# EAGLE board Adafruit Feather Zero BLE rev B (EAGLE 8.2.2)
REV: A
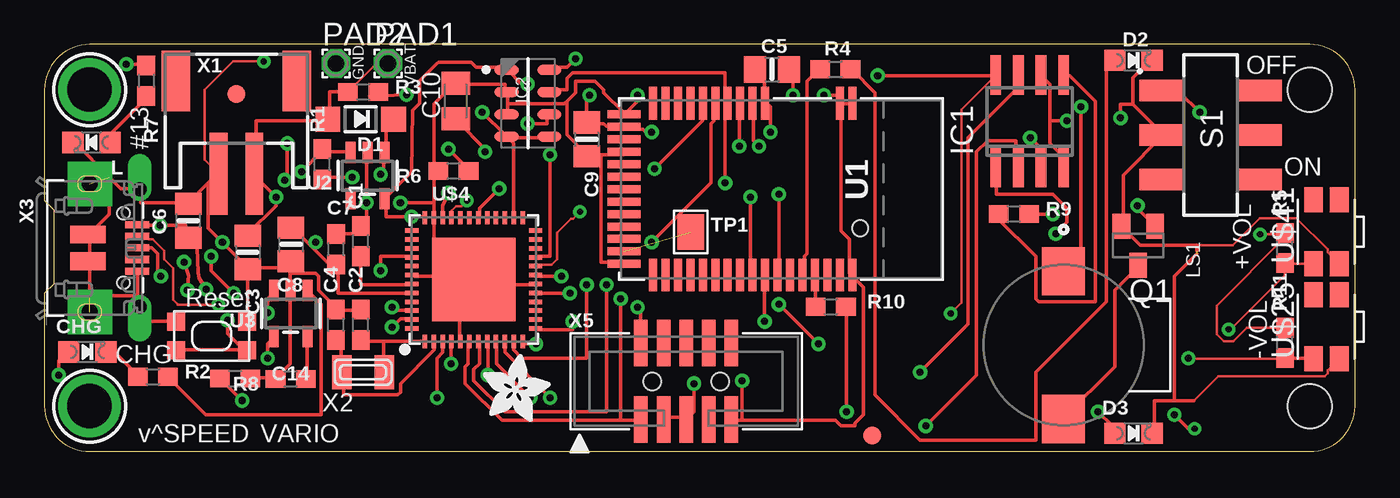
[diagram p0: board, top side]
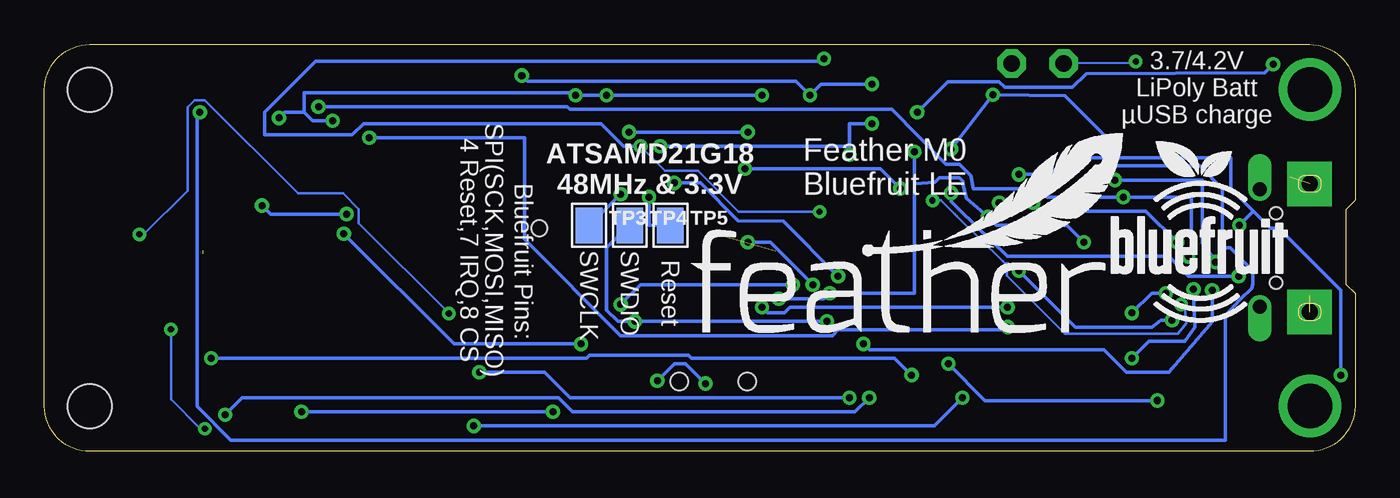
[diagram p1: board, bottom side, seen from below]

Size 73.66 x 22.86 mm. Coordinates in mm from the lower left corner, seen from the top.
Outline: 2.54,0 71.12,0 arc90 73.66,2.54 73.66,20.32 arc90 71.12,22.86 2.54,22.86 arc90 0,20.32 0,14.1 0.51,13.59 0.51,9.4 0,8.89 0,2.54 arc90 2.54,0
Copper layers (1*16): Top 0.035mm / dielectric 1.5mm / Bottom 0.035mm
Design rules "adafruit *": minimum track width 8mil, minimum drill 15.5mil, track to track 8mil, track to pad 8mil, pad to pad 8mil, via to via 8mil, smd to smd 8mil, copper to edge 10mil, drill to drill 8mil, minimum pad ring 10mil, minimum via ring 8mil, stop-mask expansion 2mil, vias tented up to drill 20mil, thermal gap 10mil
Holes 2.5 mm at 71.12,2.54 71.12,20.32
tRestrict: area 21.3,6.9 to 21.7,9.7; area 22.1,12.1 to 27.1,12.4; area 26.5,9.7 to 27.1,12.2; area 46.9,6.1 to 50.7,16.6
bRestrict: area 46.9,6.2 to 50.7,16.8

## Footprints (pad centres in the part's own frame; a part is rotated, then mirrored left to right if it is on the bottom)
0603-NO = smd 1.1 x 1: 1 -0.85,0; 2 0.85,0
0805-NO = smd 1.24 x 1.5: 1 -0.95,0; 2 0.95,0
C0805K = smd 1.3 x 1.6: 1 -1,0; 2 1,0
CHIPLED_0805_NOOUTLINE = smd 1.2 x 1.2: A 0,-1.05; C 0,1.05
SOD-123 = smd 1.4 x 1.4: A 1.85,0; C -1.85,0
SOIC08 = smd 0.6 x 2.2: 1 -1.905,-2.6; 2 -0.635,-2.6; 3 0.635,-2.6; 4 1.905,-2.6; 5 1.905,2.6; 6 0.635,2.6; 7 -0.635,2.6; 8 -1.905,2.6
SON125P300X500X100-8N = smd 1.35 x 0.55: 1 -1.2,1.875; 2 -1.2,0.625; 3 -1.2,-0.625; 4 -1.2,-1.875; 5 1.2,-1.875; 6 1.2,-0.625; 7 1.2,0.625; 8 1.2,1.875
XDCR_SMT-1127-S-R = smd 2.71 x 2.41: 1 -4.15,0; 2 4.15,0
1,6/0,9 = drill 0.914 pad 1.6 octagon: 1 0,0
SOT23 = smd 1 x 1.4: 1 -0.95,-1.1; 2 0.95,-1.1; 3 0,1.1
JS202011SCQN = smd 1.2 x 2.5: 1 -2.5,-2.75; 2 0,-2.75; 3 2.5,-2.75; 4 2.5,2.75; 5 0,2.75; 6 -2.5,2.75
KMR2 = smd 1 x 1: 1 2,0.8; 2 2,-0.8; 3 -2,0.8; 4 -2,-0.8
PAD-1.5X2.0 = smd 1.5 x 2: P$1 0,0
BLE_MODULE_RAYTAC_MDBT40 = smd 1.85 x 0.45: 1 -4.825,4; 2 -4.825,3.3; 3 -4.825,-0.9; 4 -4.825,-1.6; 5 -4.825,-2.3; 6 -4.825,-3; 7 -4.825,-3.7; 8 -4.825,-4.4; 9 -4.825,-5.1; 10 -4.825,-5.8; 11 -4.825,-6.5; 12 -4.825,-7.2; 26 4.825,-7.2; 27 4.825,-6.5; 28 4.825,-5.8; 29 4.825,-5.1; 30 4.825,-4.4; 31 4.825,-3.7; 32 4.825,-3; 33 4.825,-2.3; 34 4.825,-1.6; 35 4.825,-0.9; 36 4.825,-0.2; 37 4.825,0.5; 38 4.825,1.2; 39 4.825,1.9; 40 4.825,2.6; 41 4.825,3.3; 42 4.825,4 | smd 0.45 x 1.85: 13 -4.2,-8.825; 14 -3.5,-8.825; 15 -2.8,-8.825; 16 -2.1,-8.825; 17 -1.4,-8.825; 18 -0.7,-8.825; 19 0,-8.825; 20 0.7,-8.825; 21 1.4,-8.825; 22 2.1,-8.825; 23 2.8,-8.825; 24 3.5,-8.825; 25 4.2,-8.825 | hole 0.9: 2.2,4.45
SOT23-5 = smd 0.55 x 1.2: 1 -0.95,-1.3; 2 0,-1.3; 3 0.95,-1.3; 4 0.95,1.3; 5 -0.95,1.3
TQFN48_7MM = smd 0.25 x 0.75: 1 -2.75,-3.475; 2 -2.25,-3.475; 3 -1.75,-3.475; 4 -1.25,-3.475; 5 -0.75,-3.475; 6 -0.25,-3.475; 7 0.25,-3.475; 8 0.75,-3.475; 9 1.25,-3.475; 10 1.75,-3.475; 11 2.25,-3.475; 12 2.75,-3.475; 25 2.75,3.475; 26 2.25,3.475; 27 1.75,3.475; 28 1.25,3.475; 29 0.75,3.475; 30 0.25,3.475; 31 -0.25,3.475; 32 -0.75,3.475; 33 -1.25,3.475; 34 -1.75,3.475; 35 -2.25,3.475; 36 -2.75,3.475 | smd 0.75 x 0.25: 13 3.475,-2.75; 14 3.475,-2.25; 15 3.475,-1.75; 16 3.475,-1.25; 17 3.475,-0.75; 18 3.475,-0.25; 19 3.475,0.25; 20 3.475,0.75; 21 3.475,1.25; 22 3.475,1.75; 23 3.475,2.25; 24 3.475,2.75; 37 -3.475,2.75; 38 -3.475,2.25; 39 -3.475,1.75; 40 -3.475,1.25; 41 -3.475,0.75; 42 -3.475,0.25; 43 -3.475,-0.25; 44 -3.475,-0.75; 45 -3.475,-1.25; 46 -3.475,-1.75; 47 -3.475,-2.25; 48 -3.475,-2.75 | smd 4.7 x 4.7: THERMAL 0,0
EVQP7A01P = smd 1.4 x 1.05: 1 0,1.45; 1' 3.6,1.45; 2 0,0; 2' 3.6,0
MOUNTINGHOLE_2.5_PLATED = drill 2.5 pad 3.2: P$1 0,0
FIDUCIAL_1MM = smd 1 x 1: 1 0,0
JSTPH2 = smd 1 x 4.6: 1 -1,-3.7; 2 1,-3.7 | smd 1.6 x 3.4: NC1 -3.4,1.5; NC2 3.4,1.5
XTAL3215 = smd 1.1 x 1.9: P$1 1.2,0; P$2 -1.2,0
4UCONN_20329_V2 = smd 1 x 2: BASE@1 -0.75,-2; BASE@2 0.75,-2 | smd 0.4 x 1.35: D+ 0,0.775; D- -0.65,0.775; GND 1.3,0.775; ID 0.65,0.775; VBUS -1.3,0.775 | drill 0.8 pad 1.2 offset: SPRT@1 -3.3,0.9; SPRT@2 3.3,0.9 | drill 0.9 pad 2.5 square: SPRT@3 -3.6,-1.9; SPRT@4 3.6,-1.9 | hole 0.7: -1.95,0; 1.95,0
2X05_1.27MM_BOX_POSTS = smd 0.76 x 2.6: 1 -2.54,-2.15; 2 -2.54,2.15; 3 -1.27,-2.15; 4 -1.27,2.15; 5 0,-2.15; 6 0,2.15; 7 1.27,-2.15; 8 1.27,2.15; 9 2.54,-2.15; 10 2.54,2.15 | hole 1: -1.905,0; 1.905,0

## Placement (x,y rotation side)
C1  1uF  [0603-NO]  17.78,11.81 90 top
C2  22pF  [0603-NO]  17.78,7.11 90 top
C3  10µF  [0805-NO]  11.43,11.18 270 top
C4  22pF  [0603-NO]  16.38,7.11 90 top
C5  10uF  [0805-NO]  40.89,21.46 0 top
C6  10µF  [0805-NO]  8.09,12.96 90 top
C7  1uF  [0603-NO]  16.4,11.35 90 top
C8  10µF  [0805-NO]  13.86,11.62 270 top
C9  10uF  [0805-NO]  30.48,17.53 270 top
C10  0.1uF  [C0805K]  23.11,19.68 90 top
C14  1uF  [0603-NO]  10.72,4.09 0 top
CHG  ORANGE  [CHIPLED_0805_NOOUTLINE]  2.41,5.59 270 top
D1  MBR120  [SOD-123]  17.78,18.67 180 top
D2  RED  [CHIPLED_0805_NOOUTLINE]  61.21,21.97 270 top
D3  BLUE  [CHIPLED_0805_NOOUTLINE]  61.21,1.02 270 top
IC1  X9C102S  [SOIC08]  55.37,18.54 0 top
IC2  MS5611-01BA03  [SON125P300X500X100-8N]  27.18,19.56 0 top
L  RED  [CHIPLED_0805_NOOUTLINE]  2.65,17.36 90 top
LS1  SMT-1127-S-R  [XDCR_SMT-1127-S-R]  57.28,5.97 270 top
PAD1  WIREPAD1,6/0,9  [1,6/0,9]  19.3,21.79 0 top
PAD2  WIREPAD1,6/0,9  [1,6/0,9]  16.38,21.79 0 top
Q1  MMBT2222ALT3G  [SOT23]  61.47,11.56 180 top
R1  100k  [0603-NO]  15.62,16.13 90 top
R2  1K  [0603-NO]  6.1,4.19 0 top
R3  100k  [0603-NO]  17.91,20.19 0 top
R4  2.2K  [0603-NO]  44.45,21.46 0 top
R5  1K  [0603-NO]  69.72,11.43 90 top
R6  100K  [0603-NO]  22.99,15.75 180 top
R7  2.2K  [0603-NO]  5.71,20.83 270 top
R8  10K\  [0603-NO]  13.84,4.06 180 top
R9  1K  [0603-NO]  54.48,13.34 0 top
R10  2.2K  [0603-NO]  44.2,8.13 0 top
R11  1K  [0603-NO]  69.72,6.1 90 top
S1  JS202011SCQN  [JS202011SCQN]  65.53,17.78 270 top
SW1  SPST_TACT-KMR2  [KMR2]  9.4,6.48 180 top
TP1  SWCLK  [PAD-1.5X2.0]  36.32,12.32 0 top
TP3  SWCLK  [PAD-1.5X2.0]  43.05,12.7 0 bottom
TP4  SWDIO  [PAD-1.5X2.0]  40.77,12.7 0 bottom
TP5  SWDIO  [PAD-1.5X2.0]  38.48,12.7 0 bottom
U1  MBT40  [BLE_MODULE_RAYTAC_MDBT40]  41.4,14.73 270 top
U2  AP2112-3.3  [SOT23-5]  18.16,15.49 180 top
U3  MCP73831T-2ACI/OT  [SOT23-5]  13.84,7.75 180 top
U$4  ATSAMD21G18_QFN  [TQFN48_7MM]  24.13,9.65 0 top
U$7  [ADAFRUIT_3.5MM]  24.64,1.65 0 top
U$9  [FEATHERLOGO]  37.34,6.6 0 bottom
U$25  EVQP7A01P  [EVQP7A01P]  72.77,5.21 90 top
U$26  [BLUEFRUITLOGO_100MM]  13.72,7.24 0 bottom
U$31  MOUNTINGHOLE2.5  [MOUNTINGHOLE_2.5_PLATED]  2.54,20.32 270 top
U$32  MOUNTINGHOLE2.5  [MOUNTINGHOLE_2.5_PLATED]  2.54,2.54 270 top
U$34  FIDUCIAL""  [FIDUCIAL_1MM]  10.79,20.07 270 top
U$35  FIDUCIAL""  [FIDUCIAL_1MM]  46.53,0.9 270 top
U$41  EVQP7A01P  [EVQP7A01P]  72.77,10.54 90 top
X1  JSTPH  [JSTPH2]  10.79,19.3 0 top
X2  32.768  [XTAL3215]  17.91,4.45 0 top
X3  microUSB  [4UCONN_20329_V2]  4.45,11.43 270 top
X5  4u20317  [2X05_1.27MM_BOX_POSTS]  36.07,3.94 0 top

## Library data of the parts
C1-C7 C9 C14 CHG D1-D3 L R1-R11 TP1 TP3-TP5 U1-U3 U$4 U$7 U$9 X1 X3 X5 = microbuilder
C8 = microbuilder; COMPANY: ADAFRUIT INDUSTRIES; DRAWN: KTOWN; REV: A
C10 = rcl
IC1 = pot-xicor; MF: INTERSIL; MPN: X9C102SIZ; OC_FARNELL: 1562072; OC_NEWARK: 79K8947
IC2 = Measurement-Specialties
LS1 = SMT-1127-S-R; AVAILABILITY: Good; DESCRIPTION: Black Passive Electromagnetic SMD Buzzer 3V 80mA 2700Hz 92dB 9x3.2mm; MF: PUI Audio; MP: BOT-03D-BUJEON, SMT-1127-S-R; PACKAGE: None; PRICE: 1.43 USD
PAD1 PAD2 = wirepad
Q1 = semicon-smd-ipc
S1 = JS202011SCQN; DESCRIPTION: Sub miniature slide switches; HEIGHT: mm; MANUFACTURER_NAME: C & K COMPONENTS; MANUFACTURER_PART_NUMBER: JS202011SCQN; RS_PART_NUMBER: 1534125; RS_PRICE/STOCK: http://uk.rs-online.com/web/p/products/1534125
SW1 U$26 = adafruit
U$25 U$41 = EVQP7A01P
U$31 U$32 U$34 U$35 = microbuilder; BOM: EXCLUDE
X2 = adafruit2

## Nets
!RESET: SW1.1 SW1.3 U$4.40
+3V3: C5.1 C7.1 C8.1 C9.1 C10.1 IC1.8 IC2.1 R5.2 R11.2 U1.3 U1.14 U2.5 U$4.6 U$4.17 U$4.36 U$4.44 X5.1
A0_POT_UD: IC1.2 U$4.3
A1_POT_INC: IC1.1 U$4.7
A2_VOL_DOWN: R11.1 U$4.8 U$25.1
A3_VOL_UP: R5.1 U$4.9 U$41.1
A4_POT_CS: IC1.7 U$4.10
A5_BEEP_CTRL: IC1.3 U$4.47
AREF: C14.1 U$4.4
BLE_SWCLK: TP3.P$1 U1.36
CONNECTED: R10.1 U1.39
D0: U$4.16
D1: U$4.15
D2: U$4.23
D3: U$4.14
D4_SWDIO/RST: TP4.P$1 U1.35 U$4.13
D5: U$4.24
D6: U$4.29
D7_BLE_IRQ: U1.8 U$4.30
D8_BLE_CS: U1.7 U$4.11
D9: R3.2 R6.1 U$4.12
D10: U$4.27
D11: U$4.25
D12: U$4.28
D13_MS5611_CSB: IC2.4 IC2.5 R7.1 U$4.26
D+: U$4.34 X3.D+
D-: U$4.33 X3.D-
DCC: U1.15
DEC2: U1.41
DFU: TP1.P$1 U1.24
EN: R1.2 S1.1 U2.3
FCTRYRST: TP5.P$1 U1.34
GND: C1.2 C2.2 C3.2 C4.2 C5.2 C6.2 C7.2 C8.2 C9.2 C10.2 C14.2 D2.C D3.C IC1.4 IC1.6 IC2.2 IC2.3 L.C PAD2.1 Q1.2 R6.2 R8.2 S1.2 SW1.2 SW1.4 U1.1 U1.2 U1.13 U1.16 U1.25 U1.42 U2.2 U3.2 U$4.5 U$4.18 U$4.35 U$4.42 U$4.THERMAL U$25.2 U$41.2 X1.1 X3.BASE@1 X3.BASE@2 X3.GND X3.SPRT@1 X3.SPRT@2 X3.SPRT@3 X3.SPRT@4 X5.3 X5.5 X5.9
MISO: IC2.6 U1.5 U$4.21
MODE: R4.1 U1.38
MOSI: IC2.7 U1.6 U$4.19
N$1: CHG.C R2.1
N$2: L.A R7.2
N$3: R2.2 U3.1
N$4: R8.1 U3.5
N$5: C2.1 U$4.1 X2.P$1
N$6: D2.A R4.2
N$7: C4.1 U$4.2 X2.P$2
N$8: D3.A R10.2
N$9: Q1.1 R9.2
N$10: LS1.2 Q1.3
SCK: IC2.8 U1.4 U$4.20
SCL: U$4.32
SDA: U$4.31
SWCLK: U$4.45
SWDCLK: X5.4
SWDIO: U$4.46 X5.2
VBAT: C3.1 D1.A LS1.1 PAD1.1 R3.1 U3.3 X1.2
VBUS: C6.1 CHG.A D1.C R1.1 U2.1 U3.4 X3.VBUS
VDDCORE: C1.1 U$4.43
WIPER: IC1.5 R9.1

## Tracks (layer width: path | path; a pad name or v marks a point on that pad's centre or on a via)
!RESET  (via drill 0.39)
  Top 0.203: v18.89,10.16 18.89,10.95 20.64,10.95 U$4.40 | v10.29,7.37 10.29,6.6 11.02,5.87 11.27,5.87 11.27,5.71 | 11.27,5.71 7.46,5.71 SW1.1 | 11.27,5.71 SW1.3
  Bottom 0.203: v18.89,10.16 15.72,6.99 11.43,6.99 10.92,7.37 v10.29,7.37
+3V3  (via drill 0.35, 0.39)
  Top 0.152: R11.2 67.57,6.95 66.82,6.2 66.28,6.2 65.89,6.59 65.89,8.19 69.72,12.03 R5.2 69.64,12.19 v68.33,12.19 | IC1.8 51.53,19.2 51.53,8.35 v50.93,7.75
  Top 0.203: C5.1 40.01,21.43 40.48,20.95 40.48,19.68 U1.3 40.64,19.53 40.8,19.37 v40.8,17.94 | v46.83,21.11 53.34,21.11 IC1.8 | v30.64,20 30.48,19.84 C9.1 30.48,18.41 31.43,18.41 31.59,18.26 32.54,18.26 U1.14 32.7,18.1 33.66,18.1 33.81,17.94 v34.13,17.94 | U$4.36 21.27,13.18 v20.64,13.18 19.21,13.18 19.21,14.13 U2.5 19.21,14.29 20.64,15.72 20.7,19.18 21.08,19.56 21.08,20.83 22.04,21.78 22.16,21.88 23.97,21.88 24.26,21.59 25.88,21.59 IC2.1 26.04,21.43 26.83,20.64 v27.15,20.64 | 16.51,10 16.51,10.48 C7.1 16.51,10 | 16.51,10 16.51,8.89 20.64,8.89 U$4.44 | 16.51,10 15.08,11.43 | 15.08,11.43 13.97,12.54 C8.1 | 32.38,1.75 33.5,1.75 X5.1 | 32.38,1.75 25.72,1.75 23.65,3.81 23.65,4.76 23.81,4.92 23.81,6.03 U$4.6 | v29.53,8.89 27.62,8.89 U$4.17 | 32.38,1.75 v32.38,8.57 | v24.77,16.83 24.77,16.99 23.18,18.57 C10.1 | 15.08,11.43 15.24,11.59 v15.24,11.75
  Bottom 0.152: v50.93,7.75 55.99,12.81 55.99,13.62 56.87,14.49 59.41,14.49 64.65,19.73 65.21,19.73 65.61,19.33 65.61,14.66 68.07,12.19 v68.33,12.19
  Bottom 0.203: v46.83,21.11 46.51,20.8 31.43,20.8 v30.64,20 30,20.64 v27.15,20.64 | v34.13,17.94 v40.8,17.94 | v32.38,8.57 29.84,8.57 v29.53,8.89 24.77,8.89 24.77,15.05 | 24.77,15.05 v24.77,16.83 | v15.24,11.75 16.19,12.7 20.16,12.7 v20.64,13.18 21.84,14.22 22.04,15.05 22.04,15.18 22.23,15.37 23.37,15.37 23.62,15.11 24.77,15.05
A0_POT_UD  (via drill 0.39)
  Top 0.203: v22.07,3.02 22.07,5.24 22.38,5.56 22.38,6.03 U$4.3 | v49.53,1.43 52.39,4.29 52.39,16.83 53.02,17.46 54.61,17.46 54.61,16.03 IC1.2
  Bottom 0.203: v22.07,3.02 23.65,1.43 v49.53,1.43
A1_POT_INC  (via drill 0.39)
  Top 0.203: v31.59,9.37 31.59,2.22 25.88,2.22 24.13,3.97 24.13,4.6 24.45,4.92 24.45,6.03 U$4.7 | v43.5,6.03 v41.27,8.26 | v56.83,12.22 57.47,12.86 57.47,13.65 56.67,14.45 53.5,14.45 53.5,15.88 IC1.1
  Bottom 0.203: v31.59,9.37 40.16,9.37 v41.27,8.26 | v43.5,6.03 50.64,6.03 v56.83,12.22
A2_VOL_DOWN  (via drill 0.39)
  Top 0.152: v64.29,5.24 64.33,5.21 U$25.1 71.28,5.25 R11.1
  Top 0.203: v24.92,4.29 24.92,6.03 U$4.8
  Bottom 0.203: v24.92,4.29 25.88,5.24 37.31,5.24 37.47,5.4 43.02,5.4 43.18,5.24 v64.29,5.24
A3_VOL_UP  (via drill 0.35, 0.39)
  Top 0.152: U$41.1 69.76,10.54 R5.1 69.72,9.91 66.67,6.86 v66.55,6.86 | v64.64,1.27 64.29,1.27
  Top 0.203: v27.3,3.02 25.4,4.92 25.4,6.03 U$4.9 | 64.29,1.27 v63.5,2.06
  Bottom 0.152: v66.55,6.86 66.55,2.92 64.9,1.27 v64.64,1.27
  Bottom 0.203: v27.3,3.02 28.1,2.22 43.97,2.22 44.77,3.02 62.55,3.02 v63.5,2.06
A4_POT_CS  (via drill 0.39)
  Top 0.203: v28.42,3.02 25.88,5.56 25.88,6.03 U$4.10 | v49.21,4.45 51.91,7.14 51.91,17.62 54.61,20.32 54.61,21.11 IC1.7
  Bottom 0.203: v28.42,3.02 44.13,3.02 45.56,4.45 v49.21,4.45
A5_BEEP_CTRL  (via drill 0.39)
  Top 0.203: v19.53,6.99 20,7.46 20.64,7.46 U$4.47 | v55.4,17.62 55.88,17.14 55.88,16.03 IC1.3
  Bottom 0.203: v19.53,6.99 19.68,6.83 29.05,6.83 29.37,6.51 41.27,6.51 46.67,11.91 46.67,17.62 v55.4,17.62
AREF  (via drill 0.39)
  Top 0.203: v22.86,4.92 22.86,6.03 U$4.4 | v11.11,2.86 10,3.97 C14.1
  Bottom 0.203: v22.86,4.92 20.8,2.86 v11.11,2.86
BLE_SWCLK  (via drill 0.39)
  Top 0.203: v41.27,14.45 41.27,10 U1.36
  Bottom 0.203: v41.27,14.45 43.02,12.7 TP3.P$1
CONNECTED
  Top 0.203: R10.1 43.34,8.26 43.34,9.84 U1.39
D4_SWDIO/RST  (via drill 0.39)
  Top 0.203: v29.69,7.3 29.69,6.83 27.62,6.83 U$4.13 | v40.48,7.3 40.48,9.84 U1.35
  Bottom 0.203: v29.69,7.3 v40.48,7.3 41.43,7.3 42.07,7.94 42.07,11.43 40.8,12.7 TP4.P$1
D7_BLE_IRQ  (via drill 0.39)
  Top 0.203: v25.56,14.76 24.45,13.65 24.45,13.18 U$4.30 | v34.29,15.88 36.99,18.57 36.99,19.53 U1.8
  Bottom 0.203: v25.56,14.76 26.67,15.88 v34.29,15.88
D8_BLE_CS  (via drill 0.39)
  Top 0.203: v30.48,9.37 30.48,5.24 26.83,5.24 26.35,5.71 26.35,6.03 U$4.11 | v34.13,11.75 37.47,15.08 37.47,18.41 37.62,18.57 37.62,19.53 U1.7
  Bottom 0.203: v30.48,9.37 32.86,11.75 v34.13,11.75
D9  (via drill 0.39)
  Top 0.203: v27.62,6.03 26.99,6.03 U$4.12 | v8.03,9.05 8.1,9.87 v7.84,10.64 | v13.49,15.24 13.65,15.4 v13.65,17.3 | v20.35,20.04 18.29,19.94 R3.2 | v22.7,16.99 23.81,15.88 R6.1
  Bottom 0.203: v27.62,6.03 27.3,5.71 14.13,5.71 12.86,4.45 10.48,4.45 8.03,7.27 v8.03,9.05 | v7.84,10.64 8.57,11.75 8.57,15.24 v13.49,15.24 | v13.65,17.3 16.32,19.97 v20.35,20.04 v22.7,16.99
D13_MS5611_CSB  (via drill 0.39)
  Top 0.203: 26.04,17.62 26.35,17.3 26.35,13.18 U$4.26 | v4.6,21.75 5.71,21.75 R7.1 | v24.61,19.05 25.88,17.78 IC2.4 26.04,17.62 | 26.04,17.62 28.26,17.62 IC2.5
  Bottom 0.203: v4.6,21.75 5.08,21.27 15.11,21.21 15.88,20.45 19.68,20.45 20,20.77 22.89,20.77 v24.61,19.05
D+  (via drill 0.39)
  Top 0.203: v22.7,14.51 22.38,13.81 22.38,13.18 U$4.34 | v6.54,9.84 6.35,10.16 6.35,11.11 6.03,11.43 X3.D+
  Bottom 0.203: v22.7,14.51 22.7,14.06 22.23,13.59 19.53,10.95 10.48,10.95 9.37,9.84 v6.54,9.84
D-  (via drill 0.35)
  Top 0.152: v23.75,14.1 23.43,13.78 23.14,13.78 22.88,13.52 U$4.33 | v9.78,8.26 9.82,8.26 9.04,8.24 7.5,8.24 7.49,8.26 7.24,8.51 7.24,10.28 6.73,10.79 6.73,11.27 6.09,11.91 5.87,11.91 5.7,12.08 X3.D-
  Bottom 0.152: v23.75,14.1 23.27,14.1 22.49,13.32 22.38,13.21 19.79,10.68 19.68,10.57 19.52,10.57 19.48,10.53 19.57,10.44 19.57,9.88 16.3,6.6 9.96,6.6 9.48,7.21 9.61,8.34 v9.78,8.26
DFU  (1 unrouted)
EN  (via drill 0.39)
  Top 0.203: U2.3 17.14,16.83 15.72,16.83 R1.2 15.56,16.83 v14.45,15.72 | v64.93,19.05 63.82,20.16 S1.1
  Bottom 0.203: v14.45,15.72 14.13,16.03 8.73,16.03 7.46,14.76 7.46,11.43 7.02,11.43 5.75,10.16 5.75,9.43 5.81,9.18 6.48,8.51 7.3,7.62 7.3,0.64 63.18,0.64 65.09,2.54 65.09,19.05 v64.93,19.05
FCTRYRST  (via drill 0.39)
  Top 0.203: v39.69,14.29 39.69,10 U1.34
  Bottom 0.203: v39.69,14.29 39.69,12.7 TP5.P$1
GND  (via drill 0.35, 0.39)  (3 unrouted)
  Top 0.152: v12.32,21.91 10.61,21.91 9.02,20.32 9.02,16.38 X1.1 | U$25.2 72.12,4.56 72.12,4.39 71.96,4.23 65.98,4.23 64.61,2.86 | U$41.2 72.12,11.19 72.12,11.36 70.37,13.11 68.31,13.11 66.79,11.59 64.77,11.59
  Top 0.203: SW1.4 11.43,7.3 C3.2 11.43,10.32 | C14.2 11.59,4.13 12.86,4.13 R8.2 13.02,4.13 13.81,4.92 13.81,8.89 U3.2 13.81,9.05 13.81,10 | C2.2 17.78,7.94 16.51,7.94 C4.2 16.35,8.1 15.4,9.05 15.4,9.84 15.24,10 13.81,10 | 13.81,10.32 13.81,10.64 C8.2 13.81,10.32 | 13.81,10.32 13.81,10 | 13.81,10.32 11.43,10.32 | 9.21,15.08 9.68,15.56 X1.1 | 9.21,15.08 8.1,13.97 C6.2 7.94,13.97 5.4,13.97 5.4,14.61 X3.SPRT@1 5.24,14.76 4.29,14.76 3.65,15.4 | SW1.2 7.3,7.3 5.4,7.3 5.4,8.1 X3.SPRT@2 | 5.24,8.73 5.24,8.26 X3.SPRT@2 | 5.24,8.73 5.24,10 X3.GND | 3.65,15.4 1.75,17.3 L.C | 3.65,15.4 3.65,13.34 2.54,12.22 X3.BASE@1 2.54,12.06 2.54,10.79 X3.BASE@2 2.54,10.64 2.54,8.73 5.24,8.73 | 5.24,8.73 X3.SPRT@2 | 11.43,10.32 v10,11.75 9.21,12.54 9.21,15.08 | C7.2 16.51,12.22 17.78,12.22 C1.2 17.78,12.7 18.1,13.02 v18.1,13.97 18.1,16.67 U2.2 | 23.97,9.37 24.13,9.53 U$4.THERMAL | 23.97,9.37 23.34,8.73 23.34,6.19 U$4.5 | 21.91,9.84 24.13,9.84 U$4.THERMAL | 21.91,9.84 20.8,9.84 U$4.42 | 23.97,9.37 27.46,9.37 U$4.18 | 23.97,9.37 U$4.THERMAL | 21.91,9.84 21.91,13.02 U$4.35 21.91,13.18 21.91,13.97 | 21.91,9.84 U$4.THERMAL | 21.91,13.97 21.91,15.56 22.07,15.72 R6.2 22.07,15.88 21.91,16.03 21.91,19.53 23.02,20.64 C10.2 23.18,20.64 25.88,20.64 25.88,20.32 IC2.2 26.04,20.16 26.04,19.53 | 21.91,13.97 v20,13.97 | 31.27,16.67 32.54,16.67 32.54,16.83 U1.16 | 31.27,16.67 30.48,16.67 | 31.27,16.67 31.27,10.64 32.54,10.64 U1.25 | 26.04,19.53 26.04,19.05 IC2.3 | 29.37,19.68 29.21,19.53 26.04,19.53 | 29.37,19.68 29.84,20.16 29.84,20.8 30.96,20.8 31.43,20.32 31.43,20.16 32.54,19.05 U1.13 32.7,19.05 33.34,19.68 v33.34,20 | 30.48,16.67 29.37,17.78 29.37,19.68
  Top 0.203: 30.48,16.67 C9.2 | 61.18,19.49 61.18,20.99 62.1,21.91 D2.C | 62.9,17.78 61.18,19.49 | 63.5,2.86 62.39,2.86 62.39,1.11 D3.C | 64.61,2.86 63.5,2.86 | 64.77,11.11 63.5,9.84 63.5,2.86 | 64.77,11.27 64.77,11.59 61.59,11.59 60.64,12.54 Q1.2 60.64,12.7 60.64,15.53 62.9,17.78 | 62.9,17.78 S1.2 | 56.52,18.57 56.52,17.3 57.15,16.67 57.15,16.03 IC1.4 | 56.52,18.57 56.52,20.64 56.04,21.11 IC1.6 | X5.3 34.92,1.91 36.04,1.91 X5.5 36.2,1.91 36.51,2.22 v36.51,3.81 | v42.07,20 42.07,21.27 41.91,21.43 C5.2 | v43.81,20 44.61,20 44.61,19.68 U1.2 44.77,19.53 | 44.77,19.53 44.77,12.38 45.24,11.91 45.24,10 U1.42 45.4,9.84 46.04,9.21 46.04,2.06 45.56,1.59 45.56,1.43 44.77,1.43 44.45,1.75 39.21,1.75 | 44.77,19.53 45.24,19.53 U1.1 | 39.21,1.75 38.73,1.75 X5.9 | 39.21,1.75 v39.21,3.97 | v57.47,18.57 56.52,18.57 | 61.18,19.49 60.48,19.49 v60.48,18.73
  Bottom 0.152: PAD2.1 12.38,21.84 v12.32,21.91
  Bottom 0.203: v20,13.97 v18.1,13.97 17.62,13.49 11.75,13.49 v10,11.75 | v36.51,3.81 37.62,4.92 38.26,4.92 v39.21,3.97 | v57.47,18.57 58.58,18.57 59.05,19.05 | 59.05,19.05 59.05,20.16 43.97,20.16 v43.81,20 v42.07,20 v33.34,20 | v60.48,18.73 60.17,19.05 59.05,19.05
MISO  (via drill 0.39)
  Top 0.203: v28.42,16.67 28.42,10.95 27.62,10.95 U$4.21 | v27.15,18.41 28.26,18.41 28.26,18.89 IC2.6 | v39.05,17.14 39.05,19.53 U1.5
  Bottom 0.203: 28.42,17.14 28.42,18.41 v27.15,18.41 | 28.42,17.14 v28.42,16.67 | 28.42,17.14 v39.05,17.14
MODE
  Top 0.203: R4.1 43.5,21.43 42.86,20.8 42.86,11.11 42.7,10.95 42.7,10 U1.38
MOSI  (via drill 0.39)
  Top 0.203: v29.05,9.84 27.62,9.84 U$4.19 | v38.26,15.08 38.26,19.53 U1.6 38.26,19.68 38.26,21.27 29.69,21.27 29.37,20.95 29.37,20.32 28.42,20.32 IC2.7
  Bottom 0.203: v29.05,9.84 32.13,12.92 34.67,12.95 36.8,15.08 v38.26,15.08
N$1
  Top 0.203: R2.1 5.24,4.29 3.81,5.71 3.49,5.71 CHG.C
N$2
  Top 0.203: R7.2 5.71,19.84 3.81,17.94 3.81,17.46 L.A
N$3
  Top 0.203: R2.2 6.99,4.13 9.05,2.06 15.56,2.06 15.56,8.26 14.92,8.89 U3.1
N$4
  Top 0.203: R8.1 14.76,4.13 14.76,6.35 U3.5
N$5
  Top 0.203: 19.05,6.19 17.78,6.19 C2.1 | 19.05,6.19 21.27,6.19 U$4.1 | 19.05,6.19 19.05,4.45 X2.P$1
N$6
  Top 0.203: R4.2 45.4,21.43 46.67,20.16 46.67,3.17 49.21,0.64 55.72,0.64 55.72,4.45 59.69,8.41 59.69,21.59 60.01,21.91 D2.A
N$7
  Top 0.203: U$4.2 21.91,6.03 21.91,5.71 20,3.81 20,3.33 19.84,3.17 16.83,3.17 16.83,4.45 X2.P$2 16.67,4.45 16.67,6.03 16.51,6.19 C4.1
N$8  (via drill 0.39)
  Top 0.203: v45.09,2.22 45.09,8.1 R10.2 | v59.21,2.22 60.01,1.43 60.01,1.11 D3.A
  Bottom 0.203: v59.21,2.22 v45.09,2.22
N$9  (via drill 0.39)
  Top 0.152: R9.2 55.77,13.34
  Top 0.203: v61.44,13.81 61.44,13.65 62.39,12.7 Q1.1 | 55.4,13.34 55.77,13.34 v56.67,13.34
  Bottom 0.203: v61.44,13.81 60.96,13.34 v56.67,13.34
N$10
  Top 0.203: Q1.3 61.44,10.32 60.17,9.05 60.17,4.76 57.31,1.91 LS1.2
SCK  (via drill 0.35, 0.39)
  Top 0.152: U$4.20 27.7,10.5 28.5,10.5 28.8,10.8 28.8,12.29 29.59,13.08 29.72,13.08 v30.1,13.46
  Top 0.203: v29.84,22.07 29.37,21.59 28.42,21.59 IC2.8 | v40.16,17.14 39.85,17.46 39.85,19.53 U1.4
  Bottom 0.152: v30.1,13.46 34.64,13.46 36.94,15.76 38.78,15.76 v40.16,17.14
  Bottom 0.203: v29.84,22.07 30,21.91 58.42,21.91 61.28,19.05 61.28,17.78 56.36,17.78 55.72,18.41 42.39,18.41 41.12,17.14 v40.16,17.14
SWDIO  (via drill 0.39)
  Top 0.203: v19.53,8.1 19.53,7.94 20.64,7.94 U$4.46 | v33.34,8.1 33.5,7.94 33.5,6.19 X5.2
  Bottom 0.203: v19.53,8.1 31.75,8.1 32.07,7.78 33.02,7.78 v33.34,8.1
VBAT  (via drill 0.39)
  Top 0.152: PAD1.1 18.58,21.72 R3.1
  Top 0.203: R3.1 16.03,20.19 16.03,18.73 D1.A 15.88,18.57 11.91,18.57 11.91,15.72 X1.2 11.91,15.56 11.91,15.4 v13.02,14.29 13.02,13.81 11.43,12.22 C3.1 | v12.54,7.78 12.54,8.57 12.86,8.89 U3.3 | v10.64,8.89 9.37,10.16 v9.37,10.95 | v58.26,19.37 58.26,11.11 57.31,10.16 LS1.1
  Bottom 0.203: v12.54,7.78 11.43,8.89 v10.64,8.89 | v9.37,10.95 9.37,11.27 9.21,11.43 9.21,14.29 v13.02,14.29 17.3,14.29 17.78,14.76 21.46,14.76 21.59,15.49 22.23,16.13 22.99,16.13 26.04,19.21 44.13,19.21 44.29,19.37 v58.26,19.37
VBUS  (via drill 0.39)
  Top 0.203: v12.54,5.24 12.54,6.03 12.86,6.35 U3.4 | v9.08,9.11 8.7,9.72 8.64,10.03 8.57,11.43 8.1,11.91 C6.1 7.94,12.06 7.94,12.7 v6.51,12.7 5.24,12.7 X3.VBUS | v17.3,15.4 15.72,15.4 R1.1 | v18.89,15.56 19.05,15.72 19.05,16.67 U2.1 19.21,16.83 19.21,18.26 19.53,18.57 D1.C | v0.79,4.29 0.79,5.08 1.27,5.56 CHG.A
  Bottom 0.203: v12.54,5.24 11.59,6.19 9.56,6.19 9.02,6.99 v9.08,9.11 | v18.89,15.56 17.46,15.56 v17.3,15.4 16.19,16.51 6.99,16.51 6.99,14.76 5.71,13.49 | v0.79,4.29 0.79,9.05 4.29,12.54 4.76,12.54 5.71,13.49 | 5.71,13.49 v6.51,12.7
VDDCORE
  Top 0.203: C1.1 17.78,9.37 20.64,9.37 U$4.43
WIPER
  Top 0.152: R9.1 53.63,13.12 53.6,13.08
  Top 0.203: 53.5,13.18 53.6,13.08 55.72,10.95 55.72,8.57 55.88,8.41 59.05,8.41 59.05,19.68 57.63,21.11 57.31,21.11 IC1.5

## Text on the board
tPlace: GND | VBAT | OFF | #13 | ON | +VOL | Reset | -VOL | CHG | v^SPEED | VARIO
bPlace: 3.7/4.2V / LiPoly Batt / µUSB charge | Feather M0 / Bluefruit LE | ATSAMD21G18 / 48MHz & 3.3V | Bluefruit Pins: | SPI(SCK,MOSI,MISO) | 4 Reset,7 IRQ,8 CS | Reset | SWDIO | SWCLK